# Altium PCB PCB2.PcbDoc
Units mm, origin at the board's own origin, x right, y up, seen from the top; angles counter-clockwise.
Board outline 25 x 146.49 mm, 2 copper layers (Top Layer, Bottom Layer); 9 components, 36 nets, 158 pads, 0 vias.
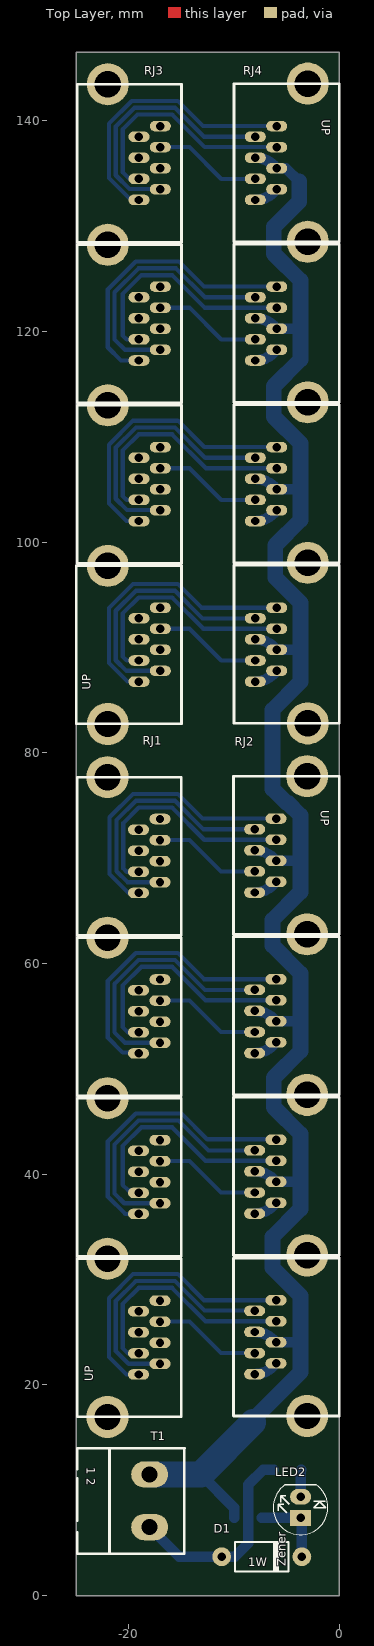
[diagram p0: Top Layer view]
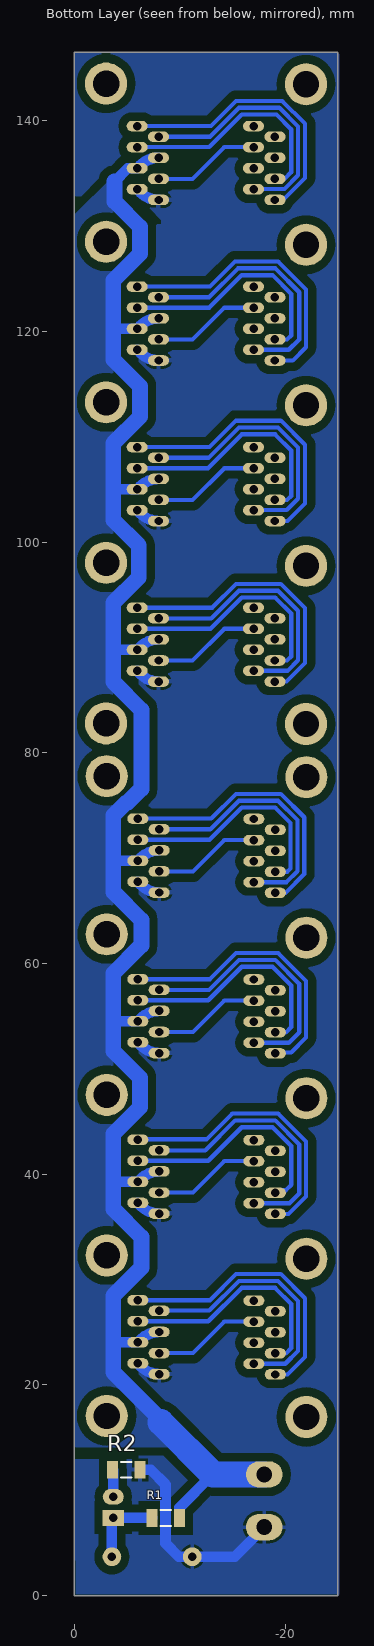
[diagram p1: Bottom Layer view, seen from below]

## Layer stack, top to bottom
Top Solder: solder mask 0.0102, Solder Resist, Dk 3.5
Top Layer: signal copper 0.0356
Dielectric 1: dielectric 0.32, FR-4, Dk 4.8
Bottom Layer: signal copper 0.0356
Bottom Solder: solder mask 0.0102, Solder Resist, Dk 3.5

## Board outline
-25,0 0,0 0,146.488 -25,146.488

## Design rules (kind name [scope] priority, off if disabled: settings)
Clearance [All] p1: gap=0.25 ignorepadtopadclearanceinfootprint=FALSE
PolygonConnect [All] p1: connectstyle=Relief reliefconductorwidth=0.4 reliefentries=4 polygonreliefangle="90 Angle" airgapwidth=0.254
RoutingVias [All] p1: holewidth=0.711 width=1.27 viastyle="Through Hole" minholewidth=0.711 minwidth=1.27 maxholewidth=0.711 maxwidth=1.27
SolderMaskExpansion [All] p1: expansion=0.102
Width [All] p1: maxlimit=3 minlimit=0.254 preferedwidth=1.5
30 further rules are at their usual default settings.

## Components (designator, comment, footprint, x,y, rotation, side; value= is the part's Value field where it differs from the comment)
D1 "Diode Zener" "Diode 1W" -7.366,3.683 r0 top
LED2 "Red" LED-5mm -3.68,7.366 r90 top
R1 "330R" "RES 1206 (3216X08L)" -9.962,7.366 r0 bottom
R2 "330R" "RES 1206 (3216X08L)" -6.223,11.938 r0 bottom
RJ1 "" rj45-w57-4 -17.029,22 r90 top
RJ2 "" rj45-w57-4 -8.042,72.738 r270 top
RJ3 "" rj45-w57-4 -16.999,87.783 r90 top
RJ4 "" rj45-w57-4 -7.982,138.487 r270 top
T1 "Phoenix terminal" "phoenix terminal 2" -29.699,13.986 r270 top

## Footprints (in the part's own frame and the unit in brackets; to place one, negate y for a bottom-side part, rotate by r counter-clockwise, add the part's x,y. Pads: shape width x height; smd on the part's side, far side on the other; paste and mask are expansions set on the pad)
"Diode 1W" [mil]
  round 70 hole 31.5: 1(-150,0) 2(150,0)
  silkscreen extent -100,-55 100,55, body extent -166,-52 165,52, height 131
LED-5mm [mm]
  rect 1.5x2 hole 0.8: 1(0,0)
  oval 1.5x2 hole 0.8: 2(2,0)
  silkscreen extent -1.6,-2.6 3.13,2.6
"phoenix terminal 2" [mm] "2 terminals"
  oval 2.5x3.5 hole 1.5: 1(2.493,11.684) 2(7.493,11.684)
  silkscreen extent 0,4.81 10.03,15
"RES 1206 (3216X08L)" [mm] "Chip Resistor, 2-Leads, Body 3.2x1.6mm, IPC High Density _ (0.125 W)"
  rect 1.05x1.7 smd: 1(0,0) 2(2.596,0)
  silkscreen extent 0.8,-0.75 1.8,0.75, body extent -0.23,-0.76 2.82,0.76, height 0.6
rj45-w57-4 [mm]
  oval 1x2 hole 0.8: 1(-1.016,2.032) 2(0,0) 3(0.984,2.032) 4(2,0) 5(2.984,2.032) 6(4,0) 7(4.984,2.032) 8(6,0) 9(14.224,2.032) 10(15.24,0) 11(16.224,2.032) 12(17.24,0) 13(18.224,2.032) 14(19.24,0) 15(20.224,2.032) 16(21.24,0) 17(29.464,2.032) 18(30.48,0) 19(31.464,2.032) 20(32.48,0) 21(33.464,2.032) 22(34.48,0) 23(35.464,2.032) 24(36.48,0) 25(44.704,2.032) 26(45.72,0) 27(46.704,2.032) 28(47.72,0) 29(48.704,2.032) 30(49.72,0) 31(50.704,2.032) 32(51.72,0)
  round 4 hole 2.5: 33(-5.046,4.983) 34(9.97,4.983) 35(25.21,4.983) 36(40.45,4.983) 37(55.69,4.983)
  silkscreen extent -5.03,-2.02 55.69,7.86

## Part data
D1: "Zener Diode", Voltage=12V, Company=E.P.I.L, Design Date=2011/11/02, Designer="Saeid Jorablo"
LED2: library part LED, "LED", Adding Date=1387/12/22, Color=Red, Designer="Saeid Jorablo", Organazation=ControTec, Size="SMD 1206"
R1 R2: library part Resistor, "Resistor", Power="1/8 W", Tolerance=5%
RJ1 RJ2 RJ3 RJ4: library part RJ45-w57-4
T1: library part "Phoenix terminal 2", "Terminal 2 Pin", ComponentLinkURL=www.picpars.com, Designer="Seyed Mohsen Ghasemain", E-mail=picpars@gmail.com

## Nets (pads, with @x,y where several pads share a name; then routed paths per layer and width w, separated by ;. In a path a pad name is that pad's centre, name@x,y a point inside that pad or via, vN(x,y) a via of type N, cw(c..) or ccw(c..) an arc to the next point about the centre after c; other vN are vias at no path point)
GND: D1.1 R2.1 RJ2.7 RJ2.8 RJ2.15 RJ2.16 RJ2.23 RJ2.24 RJ2.31 RJ2.32 RJ4.7 RJ4.8 RJ4.15 RJ4.16 RJ4.23 RJ4.24 RJ4.31 RJ4.32 T1.2 | length 38.4
  Bottom Layer w1: T1.2 -15.205,3.683 D1.1 -9.916,3.683 -8.641,4.958 -8.641,10.536 -7.239,11.938 R2.1 ; RJ2.32 ccw(c-8.042,23.471) -6.308,21.736 RJ2.31 ; RJ2.24 ccw(c-8.042,38.711) -6.308,36.976 RJ2.23 ; RJ2.16 ccw(c-8.042,53.951) -6.308,52.216 RJ2.15 ; RJ2.8 ccw(c-8.042,69.191) -6.308,67.456 RJ2.7 ; RJ4.32 ccw(c-7.982,89.22) -6.248,87.485 RJ4.31 ; RJ4.24 ccw(c-7.982,104.46) -6.248,102.725 RJ4.23 ; RJ4.16 ccw(c-7.982,119.7) -6.248,117.965 RJ4.15 ; RJ4.8 ccw(c-7.982,134.94) -6.248,133.205 RJ4.7
NetD1_2: D1.2 LED2.1 R1.2 | length 7.4
  Bottom Layer w1: R1.2 LED2.1 -3.556,7.242 D1.2
NetLED2_2: LED2.2 R2.2 | length 2.6
  Bottom Layer w1: LED2.2 -3.68,11.885 R2.2
RX+p1: RJ1.27 RJ2.3 | length 22.3
  Bottom Layer w0.4: RJ1.27 -20.19,68.704 -20.511,69.025 -20.511,73.342 -19.05,74.803 -15.875,74.803 -12.826,71.754 RJ2.3
RX+p2: RJ1.19 RJ2.11 | length 22.3
  Bottom Layer w0.4: RJ1.19 -20.063,53.464 -20.574,53.975 -20.574,57.912 -18.796,59.69 -15.875,59.69 -12.699,56.514 RJ2.11
RX+p3: RJ1.11 RJ2.19 | length 22.1
  Bottom Layer w0.4: RJ1.11 -19.318,38.481 -20.066,38.481 -20.574,38.989 -20.574,42.672 -18.796,44.45 -15.875,44.45 -12.699,41.274 RJ2.19
RX+p4: RJ1.3 RJ2.27 | length 22.4
  Bottom Layer w0.4: RJ1.3 -20.063,22.984 -20.574,23.495 -20.574,27.686 -19.05,29.21 -15.875,29.21 -12.699,26.034 RJ2.27
RX+p5: RJ3.27 RJ4.3 | length 22.4
  Bottom Layer w0.4: RJ3.27 -19.933,134.487 -20.574,135.128 -20.574,139.192 -19.177,140.589 -15.875,140.589 -12.789,137.503 RJ4.3
RX+p6: RJ3.19 RJ4.11 | length 22.3
  Bottom Layer w0.4: RJ3.19 -20.187,119.247 -20.574,119.634 -20.574,123.571 -18.796,125.349 -15.875,125.349 -12.789,122.263 RJ4.11
RX+p7: RJ3.11 RJ4.19 | length 22.6
  Bottom Layer w0.4: RJ3.11 -20.187,104.007 -20.574,104.394 -20.574,108.712 -19.05,110.236 -15.875,110.236 -12.662,107.023 RJ4.19
RX+p8: RJ3.3 RJ4.27 | length 22.2
  Bottom Layer w0.4: RJ3.3 -20.187,88.767 -20.574,89.154 -20.574,93.218 -19.05,94.742 -15.875,94.742 -12.916,91.783 RJ4.27
RX-p1: RJ1.30 RJ2.6 | length 10.2
  Bottom Layer w0.4: RJ1.30 -14.224,71.72 -11.242,68.738 RJ2.6
RX-p2: RJ1.22 RJ2.14 | length 10.2
  Bottom Layer w0.4: RJ1.22 -14.224,56.48 -11.242,53.498 RJ2.14
RX-p3: RJ1.14 RJ2.22 | length 10.2
  Bottom Layer w0.4: RJ1.14 -14.224,41.24 -11.242,38.258 RJ2.22
RX-p4: RJ1.6 RJ2.30 | length 10.2
  Bottom Layer w0.4: RJ1.6 -14.224,26 -11.242,23.018 RJ2.30
RX-p5: RJ3.30 RJ4.6 | length 10.3
  Bottom Layer w0.4: RJ3.30 -14.224,137.503 -11.208,134.487 RJ4.6
RX-p6: RJ3.22 RJ4.14 | length 10.3
  Bottom Layer w0.4: RJ3.22 -14.224,122.263 -11.208,119.247 RJ4.14
RX-p7: RJ3.14 RJ4.22 | length 10.3
  Bottom Layer w0.4: RJ3.14 -14.224,107.023 -11.208,104.007 RJ4.22
RX-p8: RJ3.6 RJ4.30 | length 10.3
  Bottom Layer w0.4: RJ3.6 -14.224,91.783 -11.208,88.767 RJ4.30
TX+p1: RJ1.25 RJ2.1 | length 26.6
  Bottom Layer w0.4: RJ1.25 -20.028,66.704 -21.811,68.487 -21.811,73.88 -19.588,76.103 -15.337,76.103 -12.988,73.754 RJ2.1
TX+p2: RJ1.17 RJ2.9 | length 27
  Bottom Layer w0.4: RJ1.17 -19.159,51.562 -20.574,51.562 -21.986,52.974 -21.986,58.338 -19.334,60.99 -15.337,60.99 -12.861,58.514 RJ2.9
TX+p3: RJ1.9 RJ2.17 | length 26.9
  Bottom Layer w0.4: RJ1.9 -20.321,36.224 -21.986,37.889 -21.986,43.098 -19.334,45.75 -14.986,45.75 -12.543,43.307 -6.043,43.307 RJ2.17
TX+p4: RJ1.1 RJ2.25 | length 26.9
  Bottom Layer w0.4: RJ1.1 -20.222,20.984 -21.878,22.64 -21.878,28.226 -19.59,30.514 -15.335,30.514 -12.855,28.034 RJ2.25
TX+p5: RJ3.25 RJ4.1 | length 26.7
  Bottom Layer w0.4: RJ3.25 -19.794,132.487 -21.874,134.567 -21.874,139.73 -19.715,141.889 -15.337,141.889 -12.951,139.503 RJ4.1
TX+p6: RJ3.17 RJ4.9 | length 27.1
  Bottom Layer w0.4: RJ3.17 -20.727,117.247 -21.986,118.506 -21.986,123.997 -19.334,126.649 -15.24,126.649 -12.854,124.263 RJ4.9
TX+p7: RJ3.9 RJ4.17 | length 27
  Bottom Layer w0.4: RJ3.9 -20.219,102.007 -21.874,103.662 -21.874,109.25 -19.588,111.536 -15.337,111.536 -12.824,109.023 RJ4.17
TX+p8: RJ3.1 RJ4.25 | length 26.6
  Bottom Layer w0.4: RJ3.1 -20.122,86.767 -21.874,88.519 -21.874,93.756 -19.588,96.042 -15.337,96.042 -13.078,93.783 RJ4.25
TX-p1: RJ1.26 RJ2.2 | length 24.4
  Bottom Layer w0.4: RJ1.26 -20.125,67.72 -21.161,68.756 -21.161,73.611 -19.319,75.453 -15.606,75.453 -12.891,72.738 RJ2.2
TX-p2: RJ1.18 RJ2.10 | length 24.7
  Bottom Layer w0.4: RJ1.18 -20.349,52.48 -21.336,53.467 -21.336,58.069 -19.065,60.34 -15.606,60.34 -12.764,57.498 RJ2.10
TX-p3: RJ1.10 RJ2.18 | length 24.8
  Bottom Layer w0.4: RJ1.10 -20.418,37.24 -21.336,38.158 -21.336,42.829 -19.065,45.1 -15.255,45.1 -12.413,42.258 RJ2.18
TX-p4: RJ1.2 RJ2.26 | length 24.6
  Bottom Layer w0.4: RJ1.2 -20.004,22 -21.228,23.224 -21.228,27.957 -19.321,29.864 -15.604,29.864 -12.791,27.051 -8.075,27.051 RJ2.26
TX-p5: RJ3.26 RJ4.2 | length 24.5
  Bottom Layer w0.4: RJ3.26 -17.033,133.537 -19.925,133.537 -21.224,134.836 -21.224,139.461 -19.446,141.239 -15.606,141.239 -12.854,138.487 RJ4.2
TX-p6: RJ3.18 RJ4.10 | length 24.7
  Bottom Layer w0.4: RJ3.18 -20.346,118.263 -21.336,119.253 -21.336,123.728 -19.065,125.999 -15.509,125.999 -12.757,123.247 RJ4.10
TX-p7: RJ3.10 RJ4.18 | length 24.8
  Bottom Layer w0.4: RJ3.10 -17.033,103.057 -20.156,103.057 -21.224,104.125 -21.224,108.981 -19.319,110.886 -15.606,110.886 -12.727,108.007 RJ4.18
TX-p8: RJ3.2 RJ4.26 | length 24.5
  Bottom Layer w0.4: RJ3.2 -20.219,87.783 -21.224,88.788 -21.224,93.487 -19.319,95.392 -15.606,95.392 -12.981,92.767 RJ4.26
VCC: R1.1 RJ2.4 RJ2.5 RJ2.12 RJ2.13 RJ2.20 RJ2.21 RJ2.28 RJ2.29 RJ4.4 RJ4.5 RJ4.12 RJ4.13 RJ4.20 RJ4.21 RJ4.28 RJ4.29 T1.1 | length 189.6
  Bottom Layer w1: -13.144,11.493 -9.962,8.311 R1.1 ; RJ2.28 cw(c-8.042,22.488) -6.253,24.277 RJ2.29 -3.841,24.034 -3.683,23.876 ; RJ2.20 cw(c-8.042,37.728) -6.253,39.517 RJ2.21 -3.714,39.274 -3.683,39.243 ; RJ2.12 cw(c-8.042,52.968) -6.253,54.757 RJ2.13 -3.779,54.514 -3.683,54.61 ; RJ2.4 cw(c-8.042,68.208) -6.253,69.997 RJ2.5 -3.714,69.754 -3.683,69.723 ; RJ4.28 cw(c-7.982,88.237) -6.193,90.026 RJ4.29 -3.816,89.783 -3.683,89.916 ; RJ4.20 cw(c-7.982,103.477) -6.193,105.266 RJ4.21 -3.816,105.023 -3.683,105.156 ; RJ4.12 cw(c-7.982,118.717) -6.193,120.506 RJ4.13 -3.689,120.263 -3.683,120.269 ; RJ4.4 cw(c-7.982,133.957) -6.193,135.746 RJ4.5 -5.074,135.503 -3.81,134.239
  Bottom Layer w1.5: -8.194,16.443 -8.194,16.698 -3.683,21.209 -3.683,23.876 -3.683,28.448 -6.35,31.115 -6.35,34.036 -3.683,36.703 -3.683,39.243 -3.683,43.815 -6.223,46.355 -6.223,49.149 -3.683,51.689 -3.683,54.61 -3.683,59.055 -6.35,61.722 -6.35,64.135 -3.683,66.802 -3.683,69.723 -3.683,74.048 -4.889,75.254 -5.023,75.254 -6.35,76.581 -6.35,84.074 -3.683,86.741 -3.683,89.916 -3.683,94.234 -6.096,96.647 -6.096,99.695 -3.683,102.108 -3.683,105.156 -3.683,109.377 -6.223,111.917 -6.223,114.808 -3.683,117.348 -3.683,120.269 -3.683,124.841 -6.223,127.381 -6.223,129.921 -3.81,132.334 -3.81,134.239
  Bottom Layer w2.5: T1.1 -13.144,11.493 -8.194,16.443
pads on no net: RJ1.4 RJ1.5 RJ1.7 RJ1.8 RJ1.12 RJ1.13 RJ1.15 RJ1.16 RJ1.20 RJ1.21 RJ1.23 RJ1.24 RJ1.28 RJ1.29 RJ1.31 RJ1.32 RJ1.33 RJ1.34 RJ1.35 RJ1.36 RJ1.37 RJ2.33 RJ2.34 RJ2.35 RJ2.36 RJ2.37 RJ3.4 RJ3.5 RJ3.7 RJ3.8 RJ3.12 RJ3.13 RJ3.15 RJ3.16 RJ3.20 RJ3.21 RJ3.23 RJ3.24 RJ3.28 RJ3.29 RJ3.31 RJ3.32 RJ3.33 RJ3.34 RJ3.35 RJ3.36 RJ3.37 RJ4.33 RJ4.34 RJ4.35 RJ4.36 RJ4.37

## Polygon pours and split planes (outlines as drawn)
GND on Bottom Layer "Top Layer-No Net" (solid, remove dead copper, pour order 2): -0.127,0.127 -24.892,0.127 -25.019,0 -25.146,0.127 -25.146,146.304 -25.019,146.431 0,146.431 0,132.715 -0.127,132.842 -5.969,132.842 -8.255,130.556 -8.255,130.175 -7.62,130.175 -6.35,131.445 -6.096,131.191 -6.096,12.954 0,12.954
VCC on Bottom Layer "Top Layer-No Net" (solid, remove dead copper, pour order 0): 0,13.97 -0.127,14.097 -11.049,14.097 -3.683,21.463 -3.683,134.747 0,131.064

## Silkscreen, mask and mechanical layers (free items; w line width, h text height)
Mechanical 1:
  the board outline again, w0.254

## Text inside footprints (layer, text, board x,y; h text height)
D1: Top Overlay "Zener" at -5.08,2.794 h0.8 r90; Top Overlay "1W" at -8.636,2.794 h0.8
RJ1: Top Overlay "UP" at -23.368,20.32 h0.8 r90
RJ2: Top Overlay "UP" at -1.778,74.549 h0.8 r270
RJ3: Top Overlay "UP" at -23.622,85.979 h0.8 r90
RJ4: Top Overlay "UP" at -1.651,140.081 h0.8 r270
T1: Top Overlay "1 2" at -24.003,12.192 h0.8 r270